# Altium PCB I2C_module_v1.PcbDoc (part 2 of 4)
Units mil, origin at the board's own origin, x right, y up, seen from the top; angles counter-clockwise.
Board outline 3300 x 2890 mil, 2 copper layers (Top Layer, Bottom Layer); 41 components, 28 nets, 177 pads, 28 vias.
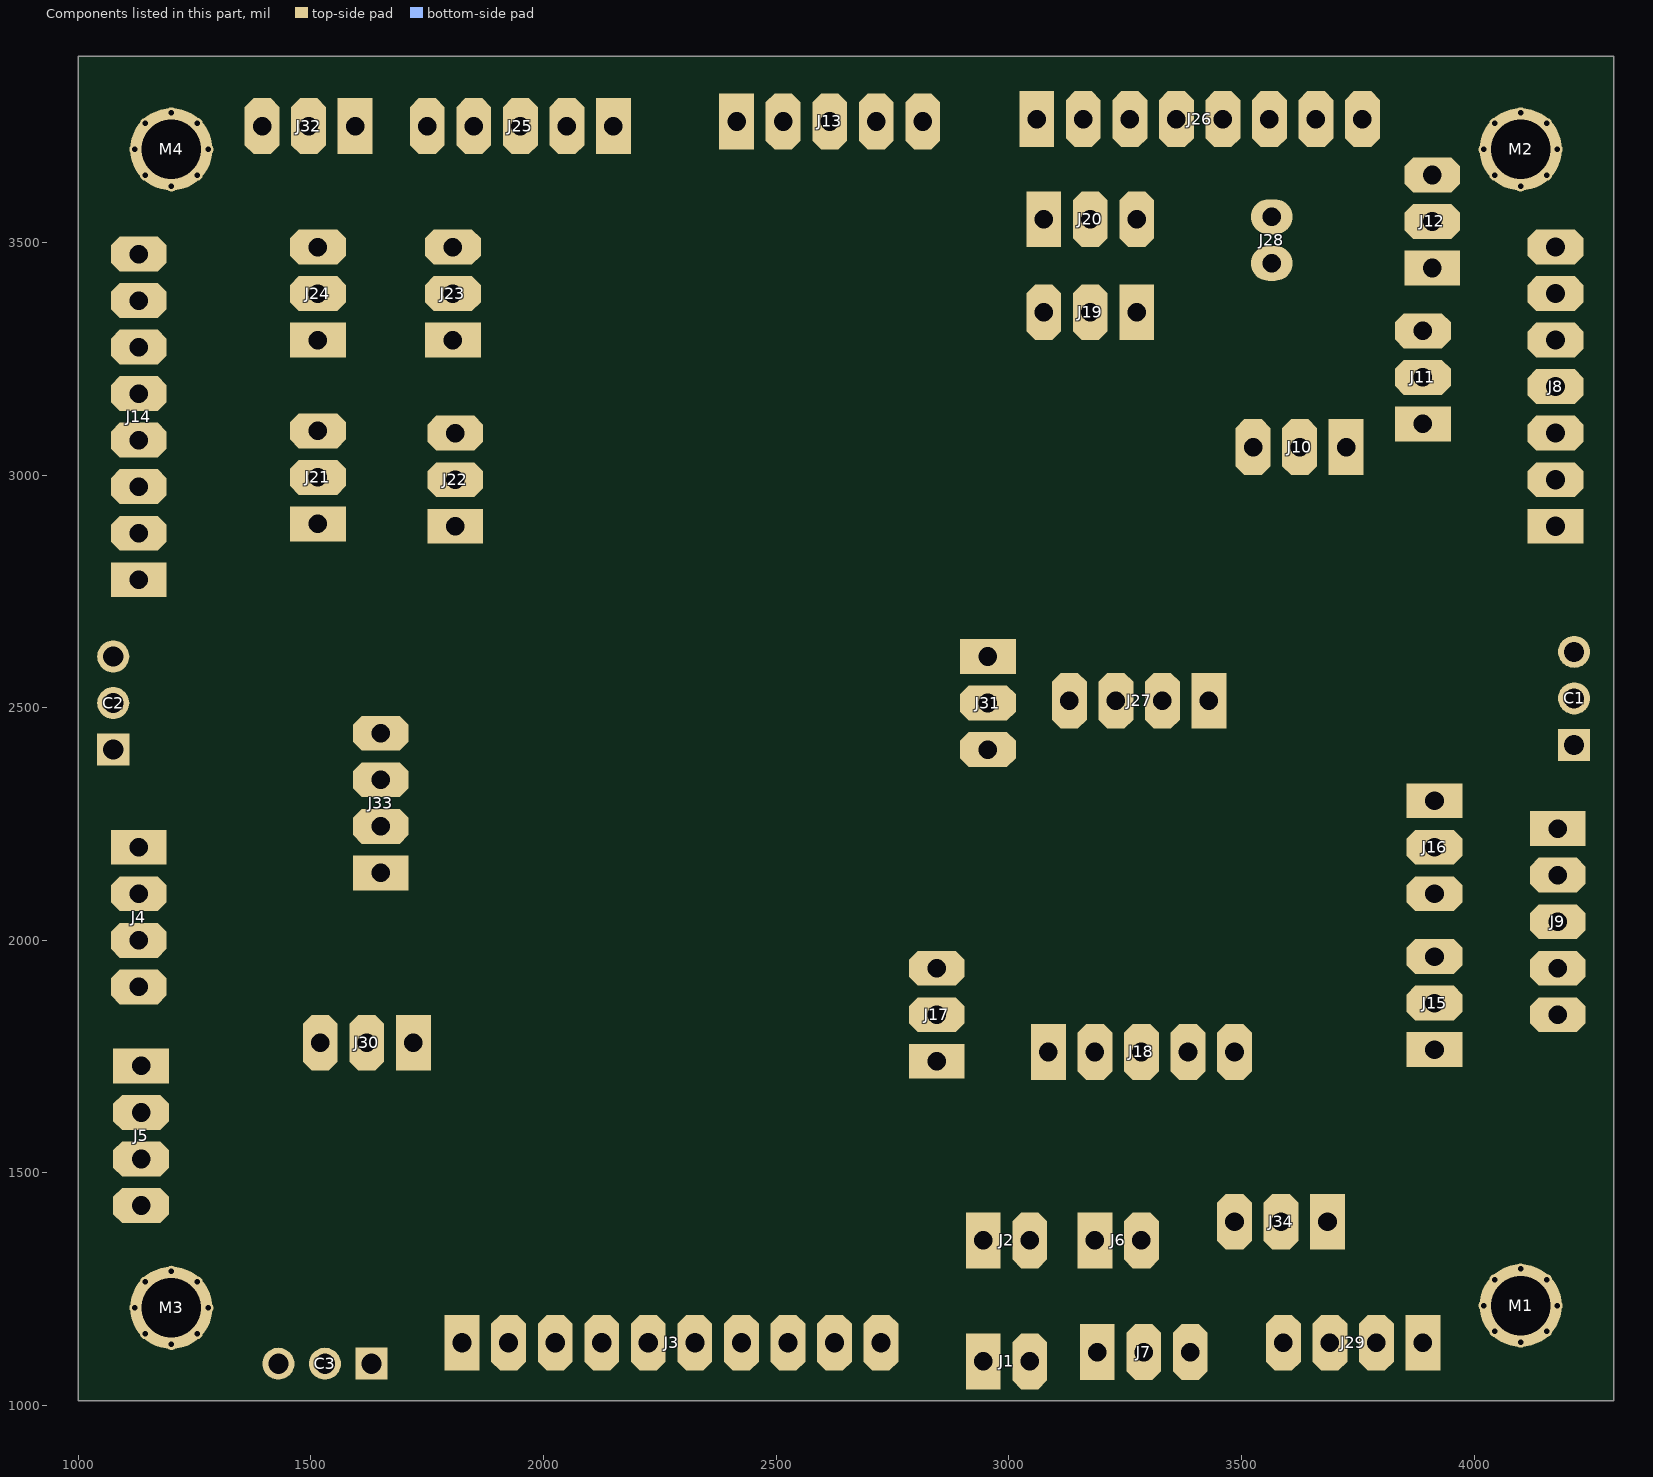
[diagram p2: the components of this part, seen from the top]

## Via types
v1: diameter 50, hole 28, Top Layer to Bottom Layer, 28 vias

## Nets (pads, with @x,y where several pads share a name; then routed paths per layer and width w, separated by ;. In a path a pad name is that pad's centre, name@x,y a point inside that pad or via, vN(x,y) a via of type N, cw(c..) or ccw(c..) an arc to the next point about the centre after c; other vN are vias at no path point) (continued)
copper on no net: (continued)
  Top Layer w0.3: 1831.2,2302.7 1835.7,2302.7 ; 1831.2,2303 1832.4,2303 ; 1831.5,2304.8 1832.1,2304.8 ; 1831.5,2305.1 1832.4,2305.1 ; 1831.5,2305.4 1832.4,2305.4 ; 1831.5,2305.7 1832.7,2305.7 ; 1831.5,2306 1832.7,2306 ; 1831.5,2306.3 1833,2306.3 ; 1831.5,2306.6 1833,2306.6 ; 1831.5,2306.9 1833.3,2306.9 ; 1831.5,2307.2 1833.6,2307.2 ; 1831.5,2307.5 1833.6,2307.5 ; 1831.8,2302.4 1838.7,2302.4 ; 1831.8,2307.8 1833.9,2307.8 ; 1831.8,2308.1 1833.9,2308.1 ; 1831.8,2308.4 1834.2,2308.4 ; 1831.8,2308.7 1834.5,2308.7 ; 1831.8,2309 1834.5,2309 ; 1831.8,2309.3 1834.8,2309.3 ; 1831.8,2309.6 1835.1,2309.6 ; 1831.8,2309.9 1835.1,2309.9 ; 1831.8,2310.2 1835.4,2310.2 ; 1831.8,2310.5 1835.7,2310.5 ; 1831.8,2310.8 1836,2310.8 ; 1832.1,2311.1 1836,2311.1 ; 1832.1,2311.4 1836.3,2311.4 ; 1832.1,2311.7 1836.6,2311.7 ; 1832.1,2312 1836.6,2312 ; 1832.1,2312.3 1836.9,2312.3 ; 1832.1,2312.6 1837.2,2312.6 ; 1832.1,2312.9 1837.5,2312.9 ; 1832.4,2302.1 1841.7,2302.1 ; 1832.4,2313.2 1837.8,2313.2 ; 1832.4,2313.5 1838.1,2313.5 ; 1832.4,2313.8 1838.1,2313.8 ; 1832.4,2314.1 1838.4,2314.1 ; 1832.4,2314.4 1838.7,2314.4 ; 1832.4,2314.7 1839,2314.7 ; 1832.7,2301.8 1845,2301.8 ; 1832.7,2315 1839.3,2315 ; 1832.7,2315.3 1839.6,2315.3 ; 1832.7,2315.6 1839.9,2315.6 ; 1832.7,2315.9 1840.5,2315.9 ; 1832.7,2316.2 1840.8,2316.2 ; 1832.7,2316.5 1841.1,2316.5 ; 1833,2316.8 1841.7,2316.8 ; 1833,2317.1 1842,2317.1 ; 1833,2317.4 1842.6,2317.4 ; 1833,2317.7 1843.2,2317.7 ; 1833,2318 1843.8,2318 ; 1833.3,2301.5 1848.3,2301.5 ; 1833.3,2318.3 1845,2318.3 ; 1833.3,2318.6 1872.3,2318.6 ; 1833.3,2318.9 1872.3,2318.9 ; 1833.3,2319.2 1872.3,2319.2 ; 1833.6,2319.5 1872,2319.5 ; 1833.6,2319.8 1872,2319.8 ; 1833.6,2320.1 1872,2320.1 ; 1833.6,2320.4 1871.7,2320.4 ; 1833.9,2301.2 1851.9,2301.2 ; 1833.9,2320.7 1871.7,2320.7 ; 1833.9,2321 1871.7,2321 ; 1833.9,2321.3 1871.4,2321.3 ; 1833.9,2321.6 1871.4,2321.6 ; 1834.2,2321.9 1871.1,2321.9 ; 1834.2,2322.2 1871.1,2322.2 ; 1834.2,2322.5 1871.1,2322.5 ; 1834.2,2322.8 1870.8,2322.8 ; 1834.5,2323.1 1870.8,2323.1 ; 1834.5,2323.4 1870.5,2323.4 ; 1834.5,2323.7 1870.5,2323.7 ; 1834.8,2300.9 1855.5,2300.9 ; 1834.8,2324 1870.5,2324 ; 1834.8,2324.3 1870.2,2324.3 ; 1834.8,2324.6 1870.2,2324.6 ; 1834.8,2324.9 1869.9,2324.9 ; 1835.1,2325.2 1869.9,2325.2 ; 1835.1,2325.5 1869.9,2325.5 ; 1835.1,2325.8 1869.6,2325.8 ; 1835.4,2300.6 1859.4,2300.6 ; 1835.4,2326.1 1869.6,2326.1 ; 1835.4,2326.4 1869.3,2326.4 ; 1835.4,2326.7 1869.3,2326.7 ; 1835.7,2327 1869.3,2327 ; 1835.7,2327.3 1869,2327.3 ; 1835.7,2327.6 1869,2327.6 ; 1836,2300.3 1877.4,2300.3 ; 1836,2327.9 1868.7,2327.9 ; 1836,2328.2 1868.7,2328.2 ; 1836,2328.5 1868.4,2328.5 ; 1836.3,2328.8 1868.4,2328.8 ; 1836.3,2329.1 1868.1,2329.1 ; 1836.6,2300 1877.4,2300 ; 1836.6,2329.4 1868.1,2329.4 ; 1836.6,2329.7 1867.8,2329.7 ; 1836.6,2330 1867.8,2330 ; 1836.9,2330.3 1867.5,2330.3 ; 1836.9,2330.6 1867.5,2330.6 ; 1837.2,2330.9 1867.2,2330.9 ; 1837.2,2331.2 1867.2,2331.2 ; 1837.2,2331.5 1866.9,2331.5 ; 1837.5,2299.7 1878.9,2299.7 ; 1837.5,2331.8 1866.9,2331.8 ; 1837.5,2332.1 1866.6,2332.1 ; 1837.8,2332.4 1866.6,2332.4 ; 1837.8,2332.7 1866.3,2332.7 ; 1838.1,2299.4 1971.6,2299.4 ; 1838.1,2333 1866,2333 ; 1838.1,2333.3 1866,2333.3 ; 1838.1,2333.6 1865.7,2333.6 ; 1838.4,2333.9 1865.7,2333.9 ; 1838.4,2334.2 1865.4,2334.2 ; 1838.7,2334.5 1865.4,2334.5 ; 1838.7,2334.8 1865.1,2334.8 ; 1839,2299.1 1970.1,2299.1 ; 1839,2335.1 1864.8,2335.1 ; 1839,2335.4 1864.8,2335.4 ; 1839.3,2335.7 1864.5,2335.7 ; 1839.6,2298.8 1968.6,2298.8 ; 1839.6,2336 1864.2,2336 ; 1839.6,2336.3 1864.2,2336.3 ; 1839.9,2336.6 1863.9,2336.6 ; 1839.9,2336.9 1863.6,2336.9 ; 1840.2,2337.2 1863.3,2337.2 ; 1840.2,2337.5 1863.3,2337.5 ; 1840.5,2298.5 1967.4,2298.5 ; 1840.5,2337.8 1863,2337.8 ; 1840.8,2338.1 1862.7,2338.1 ; 1840.8,2338.4 1862.4,2338.4 ; 1841.1,2338.7 1862.4,2338.7 ; 1841.4,2298.2 1965.9,2298.2 ; 1841.4,2339 1862.1,2339 ; 1841.4,2339.3 1861.8,2339.3 ; 1841.7,2339.6 1861.5,2339.6 ; 1842,2297.9 1964.4,2297.9 ; 1842,2339.9 1861.2,2339.9 ; 1842.3,2340.2 1860.9,2340.2 ; 1842.3,2340.5 1860.6,2340.5 ; 1842.6,2340.8 1860.3,2340.8 ; 1842.9,2297.6 1962.9,2297.6 ; 1842.9,2341.1 1860,2341.1 ; 1843.2,2341.4 1859.7,2341.4 ; 1843.5,2341.7 1859.4,2341.7 ; 1843.8,2297.3 1961.4,2297.3 ; 1843.8,2342 1859.1,2342 ; 1844.1,2342.3 1858.8,2342.3 ; 1844.4,2342.6 1858.2,2342.6 ; 1844.7,2297 1959.6,2297 ; 1844.7,2342.9 1857.9,2342.9 ; 1845,2343.2 1857.6,2343.2 ; 1845.6,2343.5 1857,2343.5 ; 1845.9,2296.7 1958.1,2296.7 ; 1845.9,2343.8 1856.7,2343.8 ; 1846.5,2344.1 1856.1,2344.1 ; 1847.1,2296.4 1956,2296.4 ; 1847.1,2318.3 1872.6,2318.3 ; 1847.1,2344.4 1855.5,2344.4 ; 1847.7,2344.7 1854.6,2344.7 ; 1848.3,2296.1 1953.9,2296.1 ; 1848.3,2318 1872.6,2318 ; 1848.3,2345 1854,2345 ; 1848.9,2317.7 1872.6,2317.7 ; 1849.5,2317.4 1872.9,2317.4 ; 1849.5,2345.3 1852.5,2345.3 ; 1849.8,2295.8 1951.8,2295.8 ; 1850.1,2317.1 1872.9,2317.1 ; 1850.7,2316.8 1872.9,2316.8 ; 1851,2316.5 1873.2,2316.5 ; 1851.3,2295.5 1949.4,2295.5 ; 1851.3,2316.2 1873.2,2316.2 ; 1851.6,2315.9 1873.2,2315.9 ; 1852.2,2315.6 1873.5,2315.6 ; 1852.5,2315.3 1873.5,2315.3 ; 1852.8,2315 1873.5,2315 ; 1853.1,2295.2 1946.7,2295.2 ; 1853.1,2314.4 1873.8,2314.4 ; 1853.1,2314.7 1873.8,2314.7 ; 1853.4,2314.1 1873.8,2314.1 ; 1853.7,2313.8 1873.8,2313.8 ; 1854,2313.5 1874.1,2313.5 ; 1854.3,2313.2 1874.1,2313.2 ; 1854.6,2312.9 1874.1,2312.9 ; 1854.9,2294.9 1944,2294.9 ; 1854.9,2312.3 1874.4,2312.3 ; 1854.9,2312.6 1874.4,2312.6 ; 1855.2,2312 1874.4,2312 ; 1855.5,2311.7 1874.7,2311.7 ; 1855.8,2311.1 1874.7,2311.1 ; 1855.8,2311.4 1874.7,2311.4 ; 1856.1,2310.8 1874.7,2310.8 ; 1856.4,2310.2 1875,2310.2 ; 1856.4,2310.5 1875,2310.5 ; 1856.7,2309.9 1875,2309.9 ; 1857,2309.6 1875,2309.6 ; 1857.3,2294.6 1941.3,2294.6 ; 1857.3,2309 1875.3,2309 ; 1857.3,2309.3 1875.3,2309.3 ; 1857.6,2308.4 1875.6,2308.4 ; 1857.6,2308.7 1875.3,2308.7 ; 1857.9,2308.1 1875.6,2308.1 ; 1858.2,2307.5 1875.6,2307.5 ; 1858.2,2307.8 1875.6,2307.8 ; 1858.5,2307.2 1875.9,2307.2 ; 1858.8,2306.6 1875.9,2306.6 ; 1858.8,2306.9 1875.9,2306.9 ; 1859.1,2306 1876.2,2306 ; 1859.1,2306.3 1875.9,2306.3 ; 1859.4,2305.7 1876.2,2305.7 ; 1859.7,2294.3 1938,2294.3 ; 1859.7,2305.1 1876.2,2305.1 ; 1859.7,2305.4 1876.2,2305.4 ; 1860,2304.5 1876.5,2304.5 ; 1860,2304.8 1876.5,2304.8 ; 1860.3,2303.9 1876.5,2303.9 ; 1860.3,2304.2 1876.5,2304.2 ; 1860.6,2303.6 1876.8,2303.6 ; 1860.9,2303 1876.8,2303 ; 1860.9,2303.3 1876.8,2303.3 ; 1861.2,2302.4 1877.1,2302.4 ; 1861.2,2302.7 1876.8,2302.7 ; 1861.5,2301.8 1877.1,2301.8 ; 1861.5,2302.1 1877.1,2302.1 ; 1861.8,2301.2 1877.4,2301.2 ; 1861.8,2301.5 1877.1,2301.5 ; 1862.1,2300.6 1877.4,2300.6 ; 1862.1,2300.9 1877.4,2300.9 ; 1862.4,2294 1934.7,2294 ; 1865.4,2293.4 1926.9,2293.4 ; 1865.4,2293.7 1931.1,2293.7 ; 1865.7,2292.5 1879.2,2292.5 ; 1865.7,2292.8 1878.9,2292.8 ; 1865.7,2293.1 1922.4,2293.1 ; 1866,2291.6 1879.2,2291.6 ; 1866,2291.9 1879.2,2291.9 ; 1866,2292.2 1879.2,2292.2 ; 1866.3,2291 1879.5,2291 ; 1866.3,2291.3 1879.2,2291.3 ; 1866.6,2290.1 1879.5,2290.1 ; 1866.6,2290.4 1879.5,2290.4 ; 1866.6,2290.7 1879.5,2290.7 ; 1866.9,2289.2 1879.8,2289.2 ; 1866.9,2289.5 1879.8,2289.5 ; 1866.9,2289.8 1879.5,2289.8 ; 1867.2,2288.3 1879.8,2288.3 ; 1867.2,2288.6 1879.8,2288.6 ; 1867.2,2288.9 1879.8,2288.9 ; 1867.5,2287.4 1880.1,2287.4 ; 1867.5,2287.7 1880.1,2287.7 ; 1867.5,2288 1879.8,2288 ; 1867.8,2286.5 1880.1,2286.5 ; 1867.8,2286.8 1880.1,2286.8 ; 1867.8,2287.1 1880.1,2287.1 ; 1868.1,2285.6 1880.4,2285.6 ; 1868.1,2285.9 1880.4,2285.9 ; 1868.1,2286.2 1880.1,2286.2 ; 1868.4,2284.7 1880.4,2284.7 ; 1868.4,2285 1880.4,2285 ; 1868.4,2285.3 1880.4,2285.3 ; 1868.7,2283.8 1880.7,2283.8 ; 1868.7,2284.1 1880.7,2284.1 ; 1868.7,2284.4 1880.4,2284.4 ; 1869,2282.9 1880.7,2282.9 ; 1869,2283.2 1880.7,2283.2 ; 1869,2283.5 1880.7,2283.5 ; 1869.3,2281.7 1881,2281.7 ; 1869.3,2282 1881,2282 ; 1869.3,2282.3 1881,2282.3 ; 1869.3,2282.6 1880.7,2282.6 ; 1869.6,2280.8 1881,2280.8 ; 1869.6,2281.1 1881,2281.1 ; 1869.6,2281.4 1881,2281.4 ; 1869.9,2279.6 1881.3,2279.6 ; 1869.9,2279.9 1881.3,2279.9 ; 1869.9,2280.2 1881.3,2280.2 ; 1869.9,2280.5 1881.3,2280.5 ; 1870.2,2278.7 1881.6,2278.7 ; 1870.2,2279 1881.3,2279 ; 1870.2,2279.3 1881.3,2279.3 ; 1870.5,2277.5 1881.6,2277.5 ; 1870.5,2277.8 1881.6,2277.8 ; 1870.5,2278.1 1881.6,2278.1 ; 1870.5,2278.4 1881.6,2278.4 ; 1870.8,2276.3 1881.9,2276.3 ; 1870.8,2276.6 1881.9,2276.6 ; 1870.8,2276.9 1881.6,2276.9 ; 1870.8,2277.2 1881.6,2277.2 ; 1871.1,2275.1 1881.9,2275.1 ; 1871.1,2275.4 1881.9,2275.4 ; 1871.1,2275.7 1881.9,2275.7 ; 1871.1,2276 1881.9,2276 ; 1871.4,2273.9 1882.2,2273.9 ; 1871.4,2274.2 1882.2,2274.2 ; 1871.4,2274.5 1882.2,2274.5 ; 1871.4,2274.8 1881.9,2274.8 ; 1871.7,2272.7 1882.2,2272.7 ; 1871.7,2273 1882.2,2273 ; 1871.7,2273.3 1882.2,2273.3 ; 1871.7,2273.6 1882.2,2273.6 ; 1872,2271.5 1882.5,2271.5 ; 1872,2271.8 1882.5,2271.8 ; 1872,2272.1 1882.5,2272.1 ; 1872,2272.4 1882.5,2272.4 ; 1872.3,2270.3 1882.5,2270.3 ; 1872.3,2270.6 1882.5,2270.6 ; 1872.3,2270.9 1882.5,2270.9 ; 1872.3,2271.2 1882.5,2271.2 ; 1872.6,2268.8 1882.8,2268.8 ; 1872.6,2269.1 1882.8,2269.1 ; 1872.6,2269.4 1882.8,2269.4 ; 1872.6,2269.7 1882.8,2269.7 ; 1872.6,2270 1882.8,2270 ; 1872.9,2267.6 1883.1,2267.6 ; 1872.9,2267.9 1882.8,2267.9 ; 1872.9,2268.2 1882.8,2268.2 ; 1872.9,2268.5 1882.8,2268.5 ; 1873.2,2266.1 1883.1,2266.1 ; 1873.2,2266.4 1883.1,2266.4 ; 1873.2,2266.7 1883.1,2266.7 ; 1873.2,2267 1883.1,2267 ; 1873.2,2267.3 1883.1,2267.3 ; 1873.5,2264.9 1883.4,2264.9 ; 1873.5,2265.2 1883.4,2265.2 ; 1873.5,2265.5 1883.1,2265.5 ; 1873.5,2265.8 1883.1,2265.8 ; 1873.8,2263.4 1883.4,2263.4 ; 1873.8,2263.7 1883.4,2263.7 ; 1873.8,2264 1883.4,2264 ; 1873.8,2264.3 1883.4,2264.3 ; 1873.8,2264.6 1883.4,2264.6 ; 1874.1,2261.9 1883.7,2261.9 ; 1874.1,2262.2 1883.7,2262.2 ; 1874.1,2262.5 1883.7,2262.5 ; 1874.1,2262.8 1883.7,2262.8 ; 1874.1,2263.1 1883.4,2263.1 ; 1874.4,2260.1 1883.7,2260.1 ; 1874.4,2260.4 1883.7,2260.4 ; 1874.4,2260.7 1883.7,2260.7 ; 1874.4,2261 1883.7,2261 ; 1874.4,2261.3 1883.7,2261.3 ; 1874.4,2261.6 1883.7,2261.6 ; 1874.7,2258.6 1884,2258.6 ; 1874.7,2258.9 1884,2258.9 ; 1874.7,2259.2 1884,2259.2 ; 1874.7,2259.5 1884,2259.5 ; 1874.7,2259.8 1884,2259.8 ; 1875,2257.1 1884.3,2257.1 ; 1875,2257.4 1884,2257.4 ; 1875,2257.7 1884,2257.7 ; 1875,2258 1884,2258 ; 1875,2258.3 1884,2258.3 ; 1875.3,2255.3 1884.3,2255.3 ; 1875.3,2255.6 1884.3,2255.6 ; 1875.3,2255.9 1884.3,2255.9 ; 1875.3,2256.2 1884.3,2256.2 ; 1875.3,2256.5 1884.3,2256.5 ; 1875.3,2256.8 1884.3,2256.8 ; 1875.6,2253.5 1884.6,2253.5 ; 1875.6,2253.8 1884.6,2253.8 ; 1875.6,2254.1 1884.6,2254.1 ; 1875.6,2254.4 1884.3,2254.4 ; 1875.6,2254.7 1884.3,2254.7 ; 1875.6,2255 1884.3,2255 ; 1875.9,2251.7 1884.6,2251.7 ; 1875.9,2252 1884.6,2252 ; 1875.9,2252.3 1884.6,2252.3 ; 1875.9,2252.6 1884.6,2252.6 ; 1875.9,2252.9 1884.6,2252.9 ; 1875.9,2253.2 1884.6,2253.2 ; 1876.2,2148.5 1876.5,2148.5 ; 1876.2,2148.8 1876.5,2148.8 ; 1876.2,2149.1 1876.8,2149.1 ; 1876.2,2149.4 1876.8,2149.4 ; 1876.2,2149.7 1877.1,2149.7 ; 1876.2,2150 1877.1,2150 ; 1876.2,2150.3 1877.4,2150.3 ; 1876.2,2150.6 1877.4,2150.6 ; 1876.2,2150.9 1877.7,2150.9 ; 1876.2,2151.2 1877.7,2151.2 ; 1876.2,2151.5 1878,2151.5 ; 1876.2,2151.8 1878,2151.8 ; 1876.2,2152.1 1878,2152.1 ; 1876.2,2152.4 1878.3,2152.4 ; 1876.2,2152.7 1878.3,2152.7 ; 1876.2,2153 1878.6,2153 ; 1876.2,2249.9 1884.9,2249.9 ; 1876.2,2250.2 1884.9,2250.2 ; 1876.2,2250.5 1884.9,2250.5 ; 1876.2,2250.8 1884.9,2250.8 ; 1876.2,2251.1 1884.6,2251.1 ; 1876.2,2251.4 1884.6,2251.4 ; 1876.5,2153.3 1878.6,2153.3 ; 1876.5,2153.6 1878.6,2153.6 ; 1876.5,2153.9 1878.9,2153.9 ; 1876.5,2154.2 1878.9,2154.2 ; 1876.5,2154.5 1878.9,2154.5 ; 1876.5,2154.8 1879.2,2154.8 ; 1876.5,2155.1 1879.2,2155.1 ; 1876.5,2247.8 1884.9,2247.8 ; 1876.5,2248.1 1884.9,2248.1 ; 1876.5,2248.4 1884.9,2248.4 ; 1876.5,2248.7 1884.9,2248.7 ; 1876.5,2249 1884.9,2249 ; 1876.5,2249.3 1884.9,2249.3 ; 1876.5,2249.6 1884.9,2249.6 ; 1876.8,2155.4 1879.2,2155.4 ; 1876.8,2155.7 1879.5,2155.7 ; 1876.8,2156 1879.5,2156 ; 1876.8,2156.3 1879.5,2156.3 ; 1876.8,2156.6 1879.8,2156.6 ; 1876.8,2156.9 1879.8,2156.9 ; 1876.8,2245.7 1885.2,2245.7 ; 1876.8,2246 1885.2,2246 ; 1876.8,2246.3 1885.2,2246.3 ; 1876.8,2246.6 1885.2,2246.6 ; 1876.8,2246.9 1885.2,2246.9 ; 1876.8,2247.2 1885.2,2247.2 ; 1876.8,2247.5 1884.9,2247.5 ; 1877.1,2157.2 1879.8,2157.2 ; 1877.1,2157.5 1880.1,2157.5 ; 1877.1,2157.8 1880.1,2157.8 ; 1877.1,2158.1 1880.1,2158.1 ; 1877.1,2158.4 1880.1,2158.4 ; 1877.1,2158.7 1880.4,2158.7 ; 1877.1,2243.6 1885.2,2243.6 ; 1877.1,2243.9 1885.2,2243.9 ; 1877.1,2244.2 1885.2,2244.2 ; 1877.1,2244.5 1885.2,2244.5 ; 1877.1,2244.8 1885.2,2244.8 ; 1877.1,2245.1 1885.2,2245.1 ; 1877.1,2245.4 1885.2,2245.4 ; 1877.4,2159 1880.4,2159 ; 1877.4,2159.3 1880.4,2159.3 ; 1877.4,2159.6 1880.4,2159.6 ; 1877.4,2159.9 1880.7,2159.9 ; 1877.4,2160.2 1880.7,2160.2 ; 1877.4,2160.5 1880.7,2160.5 ; 1877.4,2241.5 1885.5,2241.5 ; 1877.4,2241.8 1885.5,2241.8 ; 1877.4,2242.1 1885.5,2242.1 ; 1877.4,2242.4 1885.5,2242.4 ; 1877.4,2242.7 1885.5,2242.7 ; 1877.4,2243 1885.5,2243 ; 1877.4,2243.3 1885.5,2243.3 ; 1877.7,2160.8 1880.7,2160.8 ; 1877.7,2161.1 1881,2161.1 ; 1877.7,2161.4 1881,2161.4 ; 1877.7,2161.7 1881,2161.7 ; 1877.7,2162 1881,2162 ; 1877.7,2162.3 1881.3,2162.3 ; 1877.7,2239.1 1885.5,2239.1 ; 1877.7,2239.4 1885.5,2239.4 ; 1877.7,2239.7 1885.5,2239.7 ; 1877.7,2240 1885.5,2240 ; 1877.7,2240.3 1885.5,2240.3 ; 1877.7,2240.6 1885.5,2240.6 ; 1877.7,2240.9 1885.5,2240.9 ; 1877.7,2241.2 1885.5,2241.2 ; 1878,2162.6 1881.3,2162.6 ; 1878,2162.9 1881.3,2162.9 ; 1878,2163.2 1881.3,2163.2 ; 1878,2163.5 1881.6,2163.5 ; 1878,2163.8 1881.6,2163.8 ; 1878,2164.1 1881.6,2164.1 ; 1878,2236.7 1885.8,2236.7 ; 1878,2237 1885.8,2237 ; 1878,2237.3 1885.8,2237.3 ; 1878,2237.6 1885.8,2237.6 ; 1878,2237.9 1885.8,2237.9 ; 1878,2238.2 1885.8,2238.2 ; 1878,2238.5 1885.8,2238.5 ; 1878,2238.8 1885.8,2238.8 ; 1878.3,2164.4 1881.6,2164.4 ; 1878.3,2164.7 1881.6,2164.7 ; 1878.3,2165 1881.9,2165 ; 1878.3,2165.3 1881.9,2165.3 ; 1878.3,2165.6 1881.9,2165.6 ; 1878.3,2165.9 1881.9,2165.9 ; 1878.3,2234 1885.8,2234 ; 1878.3,2234.3 1885.8,2234.3 ; 1878.3,2234.6 1885.8,2234.6 ; 1878.3,2234.9 1885.8,2234.9 ; 1878.3,2235.2 1885.8,2235.2 ; 1878.3,2235.5 1885.8,2235.5 ; 1878.3,2235.8 1885.8,2235.8 ; 1878.3,2236.1 1885.8,2236.1 ; 1878.3,2236.4 1885.8,2236.4 ; 1878.6,2166.2 1881.9,2166.2 ; 1878.6,2166.5 1882.2,2166.5 ; 1878.6,2166.8 1882.2,2166.8 ; 1878.6,2167.1 1882.2,2167.1 ; 1878.6,2167.4 1882.2,2167.4 ; 1878.6,2167.7 1882.2,2167.7 ; 1878.6,2231.3 1886.1,2231.3 ; 1878.6,2231.6 1886.1,2231.6 ; 1878.6,2231.9 1886.1,2231.9 ; 1878.6,2232.2 1886.1,2232.2 ; 1878.6,2232.5 1886.1,2232.5 ; 1878.6,2232.8 1886.1,2232.8 ; 1878.6,2233.1 1886.1,2233.1 ; 1878.6,2233.4 1886.1,2233.4 ; 1878.6,2233.7 1886.1,2233.7 ; 1878.9,2168 1882.5,2168 ; 1878.9,2168.3 1882.5,2168.3 ; 1878.9,2168.6 1882.5,2168.6 ; 1878.9,2168.9 1882.5,2168.9 ; 1878.9,2169.2 1882.5,2169.2 ; 1878.9,2169.5 1882.5,2169.5 ; 1878.9,2169.8 1882.8,2169.8 ; 1878.9,2228.3 1886.1,2228.3 ; 1878.9,2228.6 1886.1,2228.6 ; 1878.9,2228.9 1886.1,2228.9 ; 1878.9,2229.2 1886.1,2229.2 ; 1878.9,2229.5 1886.1,2229.5 ; 1878.9,2229.8 1886.1,2229.8 ; 1878.9,2230.1 1886.1,2230.1 ; 1878.9,2230.4 1886.1,2230.4 ; 1878.9,2230.7 1886.1,2230.7 ; 1878.9,2231 1886.1,2231 ; 1879.2,2170.1 1882.8,2170.1 ; 1879.2,2170.4 1882.8,2170.4 ; 1879.2,2170.7 1882.8,2170.7 ; 1879.2,2171 1882.8,2171 ; 1879.2,2171.3 1882.8,2171.3 ; 1879.2,2171.6 1883.1,2171.6 ; 1879.2,2171.9 1883.1,2171.9 ; 1879.2,2172.2 1883.1,2172.2 ; 1879.2,2225 1886.4,2225 ; 1879.2,2225.3 1886.4,2225.3 ; 1879.2,2225.6 1886.4,2225.6 ; 1879.2,2225.9 1886.4,2225.9 ; 1879.2,2226.2 1886.4,2226.2 ; 1879.2,2226.5 1886.4,2226.5 ; 1879.2,2226.8 1886.4,2226.8 ; 1879.2,2227.1 1886.1,2227.1 ; 1879.2,2227.4 1886.1,2227.4 ; 1879.2,2227.7 1886.1,2227.7 ; 1879.2,2228 1886.1,2228 ; 1879.5,2172.5 1883.1,2172.5 ; 1879.5,2172.8 1883.1,2172.8 ; 1879.5,2173.1 1883.1,2173.1 ; 1879.5,2173.4 1883.4,2173.4 ; 1879.5,2173.7 1883.4,2173.7 ; 1879.5,2174 1883.4,2174 ; 1879.5,2174.3 1883.4,2174.3 ; 1879.5,2174.6 1883.4,2174.6 ; 1879.5,2174.9 1883.4,2174.9 ; 1879.5,2175.2 1883.4,2175.2 ; 1879.5,2175.5 1883.7,2175.5 ; 1879.5,2221.4 1886.4,2221.4 ; 1879.5,2221.7 1886.4,2221.7 ; 1879.5,2222 1886.4,2222 ; 1879.5,2222.3 1886.4,2222.3 ; 1879.5,2222.6 1886.4,2222.6 ; 1879.5,2222.9 1886.4,2222.9 ; 1879.5,2223.2 1886.4,2223.2 ; 1879.5,2223.5 1886.4,2223.5 ; 1879.5,2223.8 1886.4,2223.8 ; 1879.5,2224.1 1886.4,2224.1 ; 1879.5,2224.4 1886.4,2224.4 ; 1879.5,2224.7 1886.4,2224.7 ; 1879.8,2175.8 1883.7,2175.8 ; 1879.8,2176.1 1883.7,2176.1 ; 1879.8,2176.4 1883.7,2176.4 ; 1879.8,2176.7 1883.7,2176.7 ; 1879.8,2177 1883.7,2177 ; 1879.8,2177.3 1883.7,2177.3 ; 1879.8,2177.6 1884,2177.6 ; 1879.8,2177.9 1884,2177.9 ; 1879.8,2178.2 1884,2178.2 ; 1879.8,2178.5 1884,2178.5 ; 1879.8,2178.8 1884,2178.8 ; 1879.8,2179.1 1884,2179.1 ; 1879.8,2179.4 1884,2179.4 ; 1879.8,2179.7 1884,2179.7 ; 1879.8,2180 1884.3,2180 ; 1879.8,2180.3 1884.3,2180.3 ; 1879.8,2217.2 1886.4,2217.2 ; 1879.8,2217.5 1886.4,2217.5 ; 1879.8,2217.8 1886.4,2217.8 ; 1879.8,2218.1 1886.4,2218.1 ; 1879.8,2218.4 1886.4,2218.4 ; 1879.8,2218.7 1886.4,2218.7 ; 1879.8,2219 1886.4,2219 ; 1879.8,2219.3 1886.4,2219.3 ; 1879.8,2219.6 1886.4,2219.6 ; 1879.8,2219.9 1886.4,2219.9 ; 1879.8,2220.2 1886.4,2220.2 ; 1879.8,2220.5 1886.4,2220.5 ; 1879.8,2220.8 1886.4,2220.8 ; 1879.8,2221.1 1886.4,2221.1 ; 1880.1,2180.6 1884.3,2180.6 ; 1880.1,2180.9 1884.3,2180.9 ; 1880.1,2181.2 1884.3,2181.2 ; 1880.1,2181.5 1884.3,2181.5 ; 1880.1,2181.8 1884.3,2181.8 ; 1880.1,2182.1 1884.3,2182.1 ; 1880.1,2182.4 1884.6,2182.4 ; 1880.1,2182.7 1884.6,2182.7 ; 1880.1,2183 1884.6,2183 ; 1880.1,2183.3 1884.6,2183.3 ; 1880.1,2183.6 1884.6,2183.6 ; 1880.1,2183.9 1884.6,2183.9 ; 1880.1,2184.2 1884.6,2184.2 ; 1880.1,2184.5 1884.6,2184.5 ; 1880.1,2184.8 1884.6,2184.8 ; 1880.1,2185.1 1884.9,2185.1 ; 1880.1,2185.4 1884.9,2185.4 ; 1880.1,2185.7 1884.9,2185.7 ; 1880.1,2186 1884.9,2186 ; 1880.1,2186.3 1884.9,2186.3 ; 1880.1,2211.8 1886.4,2211.8 ; 1880.1,2212.1 1886.4,2212.1 ; 1880.1,2212.4 1886.4,2212.4 ; 1880.1,2212.7 1886.4,2212.7 ; 1880.1,2213 1886.4,2213 ; 1880.1,2213.3 1886.4,2213.3 ; 1880.1,2213.6 1886.4,2213.6 ; 1880.1,2213.9 1886.4,2213.9 ; 1880.1,2214.2 1886.4,2214.2 ; 1880.1,2214.5 1886.4,2214.5 ; 1880.1,2214.8 1886.4,2214.8 ; 1880.1,2215.1 1886.4,2215.1 ; 1880.1,2215.4 1886.4,2215.4 ; 1880.1,2215.7 1886.4,2215.7 ; 1880.1,2216 1886.4,2216 ; 1880.1,2216.3 1886.4,2216.3 ; 1880.1,2216.6 1886.4,2216.6 ; 1880.1,2216.9 1886.4,2216.9 ; 1880.4,2186.6 1884.9,2186.6 ; 1880.4,2186.9 1884.9,2186.9 ; 1880.4,2187.2 1884.9,2187.2 ; 1880.4,2187.5 1884.9,2187.5 ; 1880.4,2187.8 1884.9,2187.8 ; 1880.4,2188.1 1885.2,2188.1 ; 1880.4,2188.4 1885.2,2188.4 ; 1880.4,2188.7 1885.2,2188.7 ; 1880.4,2189 1885.2,2189 ; 1880.4,2189.3 1885.2,2189.3 ; 1880.4,2189.6 1885.2,2189.6 ; 1880.4,2189.9 1885.2,2189.9 ; 1880.4,2190.2 1885.2,2190.2 ; 1880.4,2190.5 1885.2,2190.5 ; 1880.4,2190.8 1885.2,2190.8 ; 1880.4,2191.1 1885.2,2191.1 ; 1880.4,2191.4 1885.2,2191.4 ; 1880.4,2191.7 1885.5,2191.7 ; 1880.4,2192 1885.5,2192 ; 1880.4,2192.3 1885.5,2192.3 ; 1880.4,2192.6 1885.5,2192.6 ; 1880.4,2192.9 1885.5,2192.9 ; 1880.4,2193.2 1885.5,2193.2 ; 1880.4,2193.5 1885.5,2193.5 ; 1880.4,2193.8 1885.5,2193.8 ; 1880.4,2194.1 1885.5,2194.1 ; 1880.4,2194.4 1885.5,2194.4 ; 1880.4,2194.7 1885.5,2194.7 ; 1880.4,2195 1885.5,2195 ; 1880.4,2195.3 1885.8,2195.3 ; 1880.4,2195.6 1885.8,2195.6 ; 1880.4,2195.9 1885.8,2195.9 ; 1880.4,2196.2 1885.8,2196.2 ; 1880.4,2196.5 1885.8,2196.5 ; 1880.4,2196.8 1885.8,2196.8 ; 1880.4,2197.1 1885.8,2197.1 ; 1880.4,2197.4 1885.8,2197.4 ; 1880.4,2197.7 1885.8,2197.7 ; 1880.4,2198 1885.8,2198 ; 1880.4,2198.3 1885.8,2198.3 ; 1880.4,2198.6 1885.8,2198.6 ; 1880.4,2198.9 1885.8,2198.9 ; 1880.4,2199.2 1885.8,2199.2 ; 1880.4,2199.5 1885.8,2199.5 ; 1880.4,2199.8 1886.1,2199.8 ; 1880.4,2200.1 1886.1,2200.1 ; 1880.4,2200.4 1886.1,2200.4 ; 1880.4,2200.7 1886.1,2200.7 ; 1880.4,2201 1886.1,2201 ; 1880.4,2201.3 1886.1,2201.3 ; 1880.4,2201.6 1886.1,2201.6 ; 1880.4,2201.9 1886.1,2201.9 ; 1880.4,2202.2 1886.1,2202.2 ; 1880.4,2202.5 1886.1,2202.5 ; 1880.4,2202.8 1886.1,2202.8 ; 1880.4,2203.1 1886.1,2203.1 ; 1880.4,2203.4 1886.1,2203.4 ; 1880.4,2203.7 1886.1,2203.7 ; 1880.4,2204 1886.1,2204 ; 1880.4,2204.3 1886.1,2204.3 ; 1880.4,2204.6 1886.1,2204.6 ; 1880.4,2204.9 1886.1,2204.9 ; 1880.4,2205.2 1886.1,2205.2 ; 1880.4,2205.5 1886.1,2205.5 ; 1880.4,2205.8 1886.4,2205.8 ; 1880.4,2206.1 1886.4,2206.1 ; 1880.4,2206.4 1886.4,2206.4 ; 1880.4,2206.7 1886.4,2206.7 ; 1880.4,2207 1886.4,2207 ; 1880.4,2207.3 1886.4,2207.3 ; 1880.4,2207.6 1886.4,2207.6 ; 1880.4,2207.9 1886.4,2207.9 ; 1880.4,2208.2 1886.4,2208.2 ; 1880.4,2208.5 1886.4,2208.5 ; 1880.4,2208.8 1886.4,2208.8 ; 1880.4,2209.1 1886.4,2209.1 ; 1880.4,2209.4 1886.4,2209.4 ; 1880.4,2209.7 1886.4,2209.7 ; 1880.4,2210 1886.4,2210 ; 1880.4,2210.3 1886.4,2210.3 ; 1880.4,2210.6 1886.4,2210.6 ; 1880.4,2210.9 1886.4,2210.9 ; 1880.4,2211.2 1886.4,2211.2 ; 1880.4,2211.5 1886.4,2211.5 ; 1881,2292.8 1917,2292.8 ; 1884,2283.5 1885.8,2283.5 ; 1884.3,2283.2 1889.1,2283.2 ; 1884.9,2282.9 1892.4,2282.9 ; 1885.5,2282.6 1895.7,2282.6 ; 1886.1,2282.3 1899.6,2282.3 ; 1886.7,2282 1903.5,2282 ; 1887.6,2281.7 1908.6,2281.7 ; 1887.9,2299.7 1972.8,2299.7 ; 1888.5,2281.4 1916.1,2281.4 ; 1889.4,2281.1 2029.2,2281.1 ; 1890.3,2280.8 2027.7,2280.8 ; 1891.5,2280.5 2025.9,2280.5 ; 1892.1,2292.5 1909.5,2292.5 ; 1892.4,2280.2 2024.4,2280.2 ; 1893.6,2279.9 2022.6,2279.9 ; 1894.5,2279.6 2020.8,2279.6 ; 1895.7,2279.3 2019.3,2279.3 ; 1896.3,2300 1974.3,2300 ; 1896.9,2141 1907.1,2141 ; 1896.9,2141.3 1907.1,2141.3 ; 1897.2,2152.4 1905.9,2152.4 ; 1897.2,2152.7 1905.9,2152.7 ; 1897.2,2153 1905.9,2153 ; 1897.2,2153.3 1905.9,2153.3 ; 1897.2,2153.6 1905.9,2153.6 ; 1897.2,2162.9 1905.9,2162.9 ; 1897.2,2163.2 1905.9,2163.2 ; 1897.2,2163.5 1905.9,2163.5 ; 1897.2,2163.8 1905.9,2163.8 ; 1897.2,2279 2017.5,2279 ; 1897.5,2151.5 1905.6,2151.5 ; 1897.5,2151.8 1905.6,2151.8 ; 1897.5,2152.1 1905.9,2152.1 ; 1897.5,2153.9 1905.9,2153.9 ; 1897.5,2154.2 1905.6,2154.2 ; 1897.5,2154.5 1905.6,2154.5 ; 1897.5,2154.8 1905.6,2154.8 ; 1897.5,2161.7 1905.6,2161.7 ; 1897.5,2162 1905.6,2162 ; 1897.5,2162.3 1905.6,2162.3 ; 1897.5,2162.6 1905.9,2162.6 ; 1897.5,2164.1 1905.9,2164.1 ; 1897.5,2164.4 1905.9,2164.4 ; 1897.5,2164.7 1905.6,2164.7 ; 1897.5,2165 1905.6,2165 ; 1897.8,2140.7 1907.1,2140.7 ; 1897.8,2150.9 1905.3,2150.9 ; 1897.8,2151.2 1905.6,2151.2 ; 1897.8,2155.1 1905.3,2155.1 ; 1897.8,2155.4 1905.3,2155.4 ; 1897.8,2161.1 1905.3,2161.1 ; 1897.8,2161.4 1905.3,2161.4 ; 1897.8,2165.3 1905.6,2165.3 ; 1897.8,2165.6 1905.3,2165.6 ; 1898.1,2150.6 1905,2150.6 ; 1898.1,2155.7 1905,2155.7 ; 1898.1,2160.8 1905,2160.8 ; 1898.1,2165.9 1905,2165.9 ; 1898.4,2129 1901.1,2129 ; 1898.4,2129.3 1900.8,2129.3 ; 1898.4,2140.1 1900.8,2140.1 ; 1898.4,2140.4 1907.1,2140.4 ; 1898.4,2150 1904.7,2150 ; 1898.4,2150.3 1905,2150.3 ; 1898.4,2156 1904.7,2156 ; 1898.4,2160.5 1904.7,2160.5 ; 1898.4,2166.2 1905,2166.2 ; 1898.4,2166.5 1904.7,2166.5 ; 1898.4,2278.7 2015.7,2278.7 ; 1898.7,2129.6 1900.8,2129.6 ; 1898.7,2129.9 1900.8,2129.9 ; 1898.7,2130.2 1900.8,2130.2 ; 1898.7,2130.5 1900.8,2130.5 ; 1898.7,2130.8 1900.8,2130.8 ; 1898.7,2131.1 1900.8,2131.1 ; 1898.7,2131.4 1900.8,2131.4 ; 1898.7,2131.7 1900.8,2131.7 ; 1898.7,2132 1900.8,2132 ; 1898.7,2132.3 1900.8,2132.3 ; 1898.7,2132.6 1900.8,2132.6 ; 1898.7,2132.9 1900.8,2132.9 ; 1898.7,2133.2 1900.8,2133.2 ; 1898.7,2133.5 1900.8,2133.5 ; 1898.7,2133.8 1900.8,2133.8 ; 1898.7,2134.1 1900.8,2134.1 ; 1898.7,2134.4 1900.8,2134.4 ; 1898.7,2134.7 1906.2,2134.7 ; 1898.7,2135 1906.2,2135 ; 1898.7,2135.3 1906.2,2135.3 ; 1898.7,2135.6 1900.8,2135.6 ; 1898.7,2135.9 1900.8,2135.9 ; 1898.7,2136.2 1900.8,2136.2 ; 1898.7,2136.5 1900.8,2136.5 ; 1898.7,2136.8 1900.8,2136.8 ; 1898.7,2137.1 1900.8,2137.1 ; 1898.7,2137.4 1900.8,2137.4 ; 1898.7,2137.7 1900.8,2137.7 ; 1898.7,2138 1900.8,2138 ; 1898.7,2138.3 1900.8,2138.3 ; 1898.7,2138.6 1900.8,2138.6 ; 1898.7,2138.9 1900.8,2138.9 ; 1898.7,2139.2 1900.8,2139.2 ; 1898.7,2139.5 1900.8,2139.5 ; 1898.7,2139.8 1900.8,2139.8 ; 1898.7,2156.3 1904.4,2156.3 ; 1898.7,2160.2 1904.4,2160.2 ; 1899,2149.7 1904.4,2149.7 ; 1899,2156.6 1904.1,2156.6 ; 1899,2159.9 1904.1,2159.9 ; 1899,2166.8 1904.4,2166.8 ; 1899.3,2149.4 1903.8,2149.4 ; 1899.3,2167.1 1903.8,2167.1 ; 1899.3,2173.4 1908,2173.4 ; 1899.3,2173.7 1908,2173.7 ; 1899.3,2174 1908,2174 ; 1899.3,2174.3 1908,2174.3 ; 1899.6,2156.9 1903.5,2156.9 ; 1899.6,2159.6 1903.8,2159.6 ; 1899.6,2172.2 1907.7,2172.2 ; 1899.6,2172.5 1907.7,2172.5 ; 1899.6,2172.8 1908,2172.8 ; 1899.6,2173.1 1908,2173.1 ; 1899.6,2174.6 1908,2174.6 ; 1899.6,2174.9 1907.7,2174.9 ; 1899.6,2175.2 1907.7,2175.2 ; 1899.6,2278.4 2013.9,2278.4 ; 1899.9,2149.1 1903.2,2149.1 ; 1899.9,2167.4 1903.2,2167.4 ; 1899.9,2171.6 1907.4,2171.6 ; 1899.9,2171.9 1907.7,2171.9 ; 1899.9,2175.5 1907.7,2175.5 ; 1899.9,2175.8 1907.4,2175.8 ; 1900.2,2157.2 1902.9,2157.2 ; 1900.2,2159.3 1902.9,2159.3 ; 1900.2,2171 1907.1,2171 ; 1900.2,2171.3 1907.4,2171.3 ; 1900.2,2176.1 1907.4,2176.1 ; 1900.2,2176.4 1907.1,2176.4 ; 1900.5,2170.7 1906.8,2170.7 ; 1900.5,2176.7 1906.8,2176.7 ; 1900.8,2170.4 1906.5,2170.4 ; 1900.8,2177 1906.5,2177 ; 1901.1,2278.1 2011.8,2278.1 ; 1901.1,2300.3 1975.5,2300.3 ; 1901.4,2170.1 1906.2,2170.1 ; 1901.4,2177.3 1906.2,2177.3 ; 1901.7,2169.8 1905.6,2169.8 ; 1901.7,2177.6 1905.6,2177.6 ; 1902.3,2277.8 2010,2277.8 ; 1902.6,2177.9 1904.7,2177.9 ; 1902.9,2169.5 1904.7,2169.5 ; 1903.5,2183 1911.9,2183 ; 1903.5,2183.3 1911.9,2183.3 ; 1903.5,2183.6 1911.9,2183.6 ; 1903.5,2183.9 1911.9,2183.9 ; 1903.5,2184.2 1911.9,2184.2 ; 1903.5,2184.5 1911.9,2184.5 ; 1903.5,2184.8 1911.9,2184.8 ; 1903.5,2185.1 1911.9,2185.1 ; 1903.8,2134.4 1906.2,2134.4 ; 1903.8,2182.1 1911.6,2182.1 ; 1903.8,2182.4 1911.9,2182.4 ; 1903.8,2182.7 1911.9,2182.7 ; 1903.8,2185.4 1911.9,2185.4 ; 1903.8,2185.7 1911.9,2185.7 ; 1903.8,2186 1911.6,2186 ; 1903.8,2277.5 2007.9,2277.5 ; 1904.1,2181.8 1911.6,2181.8 ; 1904.1,2186.3 1911.6,2186.3 ; 1904.4,2181.2 1911,2181.2 ; 1904.4,2181.5 1911.3,2181.5 ; 1904.4,2186.6 1911.3,2186.6 ; 1904.7,2134.1 1906.2,2134.1 ; 1904.7,2135.6 1906.2,2135.6 ; 1904.7,2180.9 1910.7,2180.9 ; 1904.7,2186.9 1911,2186.9 ; 1904.7,2300.6 1977,2300.6 ; 1905,2133.8 1906.2,2133.8 ; 1905,2135.9 1906.2,2135.9 ; 1905,2180.6 1910.4,2180.6 ; 1905,2187.2 1910.7,2187.2 ; 1905.3,2129 1907.7,2129 ; 1905.3,2132.6 1906.2,2132.6 ; 1905.3,2132.9 1906.2,2132.9 ; 1905.3,2133.2 1906.2,2133.2 ; 1905.3,2133.5 1906.2,2133.5 ; 1905.3,2136.2 1906.2,2136.2 ; 1905.3,2136.5 1906.2,2136.5 ; 1905.3,2136.8 1906.2,2136.8 ; 1905.3,2137.1 1906.2,2137.1 ; 1905.3,2187.5 1910.4,2187.5 ; 1905.3,2277.2 2006.1,2277.2 ; 1905.6,2180.3 1910.1,2180.3 ; 1905.6,2187.8 1909.8,2187.8 ; 1905.9,2129.3 1907.7,2129.3 ; 1905.9,2140.1 1907.1,2140.1 ; 1906.2,2139.5 1907.4,2139.5 ; 1906.2,2139.8 1907.4,2139.8 ; 1906.2,2180 1909.2,2180 ; 1906.2,2188.1 1909.2,2188.1 ; 1906.5,2129.6 1907.7,2129.6 ; 1906.5,2138.3 1907.4,2138.3 ; 1906.5,2138.6 1907.4,2138.6 ; 1906.5,2138.9 1907.4,2138.9 ; 1906.5,2139.2 1907.4,2139.2 ; 1906.8,2129.9 1908,2129.9 ; 1906.8,2130.2 1908,2130.2 ; 1906.8,2276.9 2003.7,2276.9 ; 1907.1,2130.5 1908,2130.5 ; 1907.4,2130.8 1908.3,2130.8 ; 1907.4,2131.1 1908.3,2131.1 ; 1907.7,2131.4 1908.3,2131.4 ; 1907.7,2162 1916.1,2162 ; 1907.7,2162.3 1916.1,2162.3 ; 1907.7,2162.6 1916.1,2162.6 ; 1907.7,2162.9 1916.1,2162.9 ; 1907.7,2163.2 1916.1,2163.2 ; 1907.7,2163.5 1916.1,2163.5 ; 1907.7,2163.8 1916.1,2163.8 ; 1907.7,2164.1 1916.1,2164.1 ; 1907.7,2164.4 1916.1,2164.4 ; 1907.7,2164.7 1916.1,2164.7 ; 1907.7,2193.2 1916.1,2193.2 ; 1907.7,2193.5 1916.1,2193.5 ; 1907.7,2193.8 1916.1,2193.8 ; 1907.7,2194.1 1916.1,2194.1 ; 1907.7,2194.4 1916.1,2194.4 ; 1907.7,2194.7 1916.1,2194.7 ; 1907.7,2195 1916.1,2195 ; 1907.7,2195.3 1916.1,2195.3 ; 1907.7,2195.6 1916.1,2195.6 ; 1908,2161.4 1915.8,2161.4 ; 1908,2161.7 1915.8,2161.7 ; 1908,2165 1915.8,2165 ; 1908,2165.3 1915.8,2165.3 ; 1908,2192.3 1915.8,2192.3 ; 1908,2192.6 1915.8,2192.6 ; 1908,2192.9 1916.1,2192.9 ; 1908,2195.9 1916.1,2195.9 ; 1908,2196.2 1915.8,2196.2 ; 1908,2196.5 1915.8,2196.5 ; 1908,2300.9 1978.2,2300.9 ; 1908.3,2160.8 1915.5,2160.8 ; 1908.3,2161.1 1915.5,2161.1 ; 1908.3,2165.6 1915.5,2165.6 ; 1908.3,2165.9 1915.5,2165.9 ; 1908.3,2192 1915.5,2192 ; 1908.3,2196.8 1915.5,2196.8 ; 1908.3,2276.6 2001.6,2276.6 ; 1908.6,2160.5 1915.2,2160.5 ; 1908.6,2166.2 1915.2,2166.2 ; 1908.6,2191.7 1915.2,2191.7 ; 1908.6,2197.1 1915.2,2197.1 ; 1908.9,2160.2 1914.9,2160.2 ; 1908.9,2166.5 1914.9,2166.5 ; 1908.9,2191.4 1915.2,2191.4 ; 1908.9,2197.4 1914.9,2197.4 ; 1909.2,2159.9 1914.6,2159.9 ; 1909.2,2166.8 1914.6,2166.8 ; 1909.2,2191.1 1914.9,2191.1 ; 1909.2,2197.7 1914.6,2197.7 ; 1909.5,2190.8 1914.3,2190.8 ; 1909.5,2198 1914.3,2198 ; 1909.8,2159.6 1914,2159.6 ; 1909.8,2167.1 1914.3,2167.1 ; 1910.1,2167.4 1913.7,2167.4 ; 1910.1,2190.5 1914,2190.5 ; 1910.1,2198.3 1913.7,2198.3 ; 1910.1,2276.3 1999.5,2276.3 ; 1910.4,2159.3 1913.4,2159.3 ; 1910.7,2190.2 1913.1,2190.2 ; 1910.7,2301.2 1979.7,2301.2 ; 1911,2198.6 1912.8,2198.6 ; 1911.6,2276 1997.1,2276 ; 1913.1,2301.5 1980.9,2301.5 ; 1913.4,2275.7 1994.7,2275.7 ; 1915.2,2301.8 1982.1,2301.8 ; 1915.5,2275.4 1992,2275.4 ; 1917,2141 1923,2141 ; 1917,2141.3 1923,2141.3 ; 1917.3,2302.1 1983.3,2302.1 ; 1917.9,2140.7 1922.1,2140.7 ; 1917.9,2162.3 1926.3,2162.3 ; 1917.9,2162.6 1926.3,2162.6 ; 1917.9,2162.9 1926.3,2162.9 ; 1917.9,2163.2 1926.3,2163.2 ; 1917.9,2163.5 1926.3,2163.5 ; 1917.9,2163.8 1926.3,2163.8 ; 1917.9,2164.1 1926.3,2164.1 ; 1917.9,2164.4 1926.3,2164.4 ; 1917.9,2193.2 1926.3,2193.2 ; 1917.9,2193.5 1926.3,2193.5 ; 1917.9,2193.8 1926.3,2193.8 ; 1917.9,2194.1 1926.3,2194.1 ; 1917.9,2194.4 1926.3,2194.4 ; 1917.9,2194.7 1926.3,2194.7 ; 1917.9,2195 1926.3,2195 ; 1917.9,2195.3 1926.3,2195.3 ; 1917.9,2195.6 1926.3,2195.6 ; 1917.9,2275.1 1989.3,2275.1 ; 1918.2,2161.4 1926,2161.4 ; 1918.2,2161.7 1926,2161.7 ; 1918.2,2162 1926.3,2162 ; 1918.2,2164.7 1926.3,2164.7 ; 1918.2,2165 1926.3,2165 ; 1918.2,2165.3 1926,2165.3 ; 1918.2,2192.6 1926,2192.6 ; 1918.2,2192.9 1926.3,2192.9 ; 1918.2,2195.9 1926.3,2195.9 ; 1918.2,2196.2 1926,2196.2 ; 1918.5,2129 1921.8,2129 ; 1918.5,2140.1 1921.2,2140.1 ; 1918.5,2140.4 1921.5,2140.4 ; 1918.5,2161.1 1925.7,2161.1 ; 1918.5,2165.6 1926,2165.6 ; 1918.5,2165.9 1925.7,2165.9 ; 1918.5,2192 1925.7,2192 ; 1918.5,2192.3 1926,2192.3 ; 1918.5,2196.5 1926,2196.5 ; 1918.5,2196.8 1925.7,2196.8 ; 1918.8,2129.3 1921.2,2129.3 ; 1918.8,2129.6 1920.9,2129.6 ; 1918.8,2129.9 1920.9,2129.9 ; 1918.8,2130.2 1920.9,2130.2 ; 1918.8,2130.5 1920.9,2130.5 ; 1918.8,2130.8 1920.9,2130.8 ; 1918.8,2131.1 1920.9,2131.1 ; 1918.8,2131.4 1920.9,2131.4 ; 1918.8,2131.7 1920.9,2131.7 ; 1918.8,2132 1920.9,2132 ; 1918.8,2132.3 1920.9,2132.3 ; 1918.8,2132.6 1920.9,2132.6 ; 1918.8,2132.9 1920.9,2132.9 ; 1918.8,2133.2 1920.9,2133.2 ; 1918.8,2133.5 1920.9,2133.5 ; 1918.8,2133.8 1920.9,2133.8 ; 1918.8,2134.1 1920.9,2134.1 ; 1918.8,2134.4 1920.9,2134.4 ; 1918.8,2134.7 1920.9,2134.7 ; 1918.8,2135 1920.9,2135 ; 1918.8,2135.3 1920.9,2135.3 ; 1918.8,2135.6 1920.9,2135.6 ; 1918.8,2135.9 1920.9,2135.9 ; 1918.8,2136.2 1920.9,2136.2 ; 1918.8,2136.5 1920.9,2136.5 ; 1918.8,2136.8 1920.9,2136.8 ; 1918.8,2137.1 1920.9,2137.1 ; 1918.8,2137.4 1920.9,2137.4 ; 1918.8,2137.7 1920.9,2137.7 ; 1918.8,2138 1920.9,2138 ; 1918.8,2138.3 1920.9,2138.3 ; 1918.8,2138.6 1920.9,2138.6 ; 1918.8,2138.9 1920.9,2138.9 ; 1918.8,2139.2 1920.9,2139.2 ; 1918.8,2139.5 1920.9,2139.5 ; 1918.8,2139.8 1920.9,2139.8 ; 1918.8,2160.5 1925.4,2160.5 ; 1918.8,2160.8 1925.7,2160.8 ; 1918.8,2166.2 1925.4,2166.2 ; 1918.8,2191.7 1925.7,2191.7 ; 1918.8,2197.1 1925.4,2197.1 ; 1919.1,2160.2 1925.1,2160.2 ; 1919.1,2166.5 1925.1,2166.5 ; 1919.1,2191.4 1925.4,2191.4 ; 1919.1,2197.4 1925.4,2197.4 ; 1919.4,2166.8 1924.8,2166.8 ; 1919.4,2191.1 1925.1,2191.1 ; 1919.4,2197.7 1925.1,2197.7 ; 1919.4,2302.4 1984.5,2302.4 ; 1919.7,2159.9 1924.8,2159.9 ; 1919.7,2190.8 1924.5,2190.8 ; 1919.7,2198 1924.5,2198 ; 1920,2159.6 1924.2,2159.6 ; 1920,2167.1 1924.5,2167.1 ; 1920.3,2190.5 1924.2,2190.5 ; 1920.3,2198.3 1923.9,2198.3 ; 1920.6,2167.4 1923.9,2167.4 ; 1920.9,2159.3 1923.6,2159.3 ; 1920.9,2274.8 1986.3,2274.8 ; 1921.2,2190.2 1923.3,2190.2 ; 1921.2,2198.6 1923,2198.6 ; 1921.2,2302.7 1985.7,2302.7 ; 1923,2303 1986.9,2303 ; 1923.9,2274.5 1983,2274.5 ; 1924.8,2129 1927.8,2129 ; 1924.8,2303.3 1988.1,2303.3 ; 1926,2129.3 1927.8,2129.3 ; 1926.6,2129.6 1927.8,2129.6 ; 1926.6,2303.6 1989,2303.6 ; 1926.9,2129.9 1928.1,2129.9 ; 1927.2,2130.2 1928.1,2130.2 ; 1927.2,2130.5 1928.1,2130.5 ; 1927.2,2274.2 1979.4,2274.2 ; 1927.5,2130.8 1928.4,2130.8 ; 1927.5,2131.1 1928.4,2131.1 ; 1927.8,2131.4 1928.4,2131.4 ; 1927.8,2131.7 1928.4,2131.7 ; 1928.1,2159.3 1955.1,2159.3 ; 1928.1,2159.6 1955.1,2159.6 ; 1928.1,2159.9 1954.8,2159.9 ; 1928.1,2160.2 1954.8,2160.2 ; 1928.1,2160.5 1954.5,2160.5 ; 1928.1,2160.8 1954.5,2160.8 ; 1928.1,2161.1 1954.2,2161.1 ; 1928.1,2161.4 1954.2,2161.4 ; 1928.1,2161.7 1953.9,2161.7 ; 1928.1,2162 1953.9,2162 ; 1928.1,2162.3 1953.6,2162.3 ; 1928.1,2162.6 1953.6,2162.6 ; 1928.1,2162.9 1953.3,2162.9 ; 1928.1,2163.2 1953.3,2163.2 ; 1928.1,2163.5 1953,2163.5 ; 1928.1,2163.8 1953,2163.8 ; 1928.1,2164.1 1952.7,2164.1 ; 1928.1,2164.4 1952.7,2164.4 ; 1928.1,2164.7 1952.4,2164.7 ; 1928.1,2165 1952.4,2165 ; 1928.1,2165.3 1952.1,2165.3 ; 1928.1,2165.6 1952.1,2165.6 ; 1928.1,2165.9 1951.8,2165.9 ; 1928.1,2166.2 1951.8,2166.2 ; 1928.1,2166.5 1951.5,2166.5 ; 1928.1,2166.8 1951.5,2166.8 ; 1928.1,2167.1 1951.2,2167.1 ; 1928.1,2167.4 1951.2,2167.4 ; 1928.1,2190.2 1939.8,2190.2 ; 1928.1,2190.5 1939.8,2190.5 ; 1928.1,2190.8 1939.5,2190.8 ; 1928.1,2191.1 1939.5,2191.1 ; 1928.1,2191.4 1939.2,2191.4 ; 1928.1,2191.7 1939.2,2191.7 ; 1928.1,2192 1938.9,2192 ; 1928.1,2192.3 1938.9,2192.3 ; 1928.1,2192.6 1938.6,2192.6 ; 1928.1,2192.9 1938.6,2192.9 ; 1928.1,2193.2 1938.3,2193.2 ; 1928.1,2193.5 1938.3,2193.5 ; 1928.1,2193.8 1938,2193.8 ; 1928.1,2194.1 1938,2194.1 ; 1928.1,2194.4 1937.7,2194.4 ; 1928.1,2194.7 1937.7,2194.7 ; 1928.1,2195 1937.4,2195 ; 1928.1,2195.3 1937.4,2195.3 ; 1928.1,2195.6 1937.1,2195.6 ; 1928.1,2195.9 1937.1,2195.9 ; 1928.1,2196.2 1936.8,2196.2 ; 1928.1,2196.5 1936.8,2196.5 ; 1928.1,2196.8 1936.8,2196.8 ; 1928.1,2197.1 1936.8,2197.1 ; 1928.1,2197.4 1936.8,2197.4 ; 1928.1,2197.7 1936.8,2197.7 ; 1928.1,2198 1936.8,2198 ; 1928.1,2198.3 1936.8,2198.3 ; 1928.1,2198.6 1936.8,2198.6 ; 1928.1,2303.9 1990.2,2303.9 ; 1929.3,2189.6 1940.1,2189.6 ; 1929.3,2189.9 1940.1,2189.9 ; 1929.6,2189 1940.4,2189 ; 1929.6,2189.3 1940.4,2189.3 ; 1929.9,2188.4 1940.7,2188.4 ; 1929.9,2188.7 1940.7,2188.7 ; 1929.9,2304.2 1991.4,2304.2 ; 1930.2,2187.8 1941,2187.8 ; 1930.2,2188.1 1941,2188.1 ; 1930.5,2187.2 1941.3,2187.2 ; 1930.5,2187.5 1941.3,2187.5 ; 1930.8,2186.6 1941.6,2186.6 ; 1930.8,2186.9 1941.6,2186.9 ; 1931.1,2186 1941.9,2186 ; 1931.1,2186.3 1941.9,2186.3 ; 1931.4,2185.4 1942.2,2185.4 ; 1931.4,2185.7 1942.2,2185.7 ; 1931.4,2273.9 1975.5,2273.9 ; 1931.4,2304.5 1992.3,2304.5 ; 1931.7,2184.8 1942.5,2184.8 ; 1931.7,2185.1 1942.5,2185.1 ; 1932,2184.2 1942.8,2184.2 ; 1932,2184.5 1942.8,2184.5 ; 1932.3,2183.6 1943.1,2183.6 ; 1932.3,2183.9 1943.1,2183.9 ; 1932.6,2183 1943.4,2183 ; 1932.6,2183.3 1943.4,2183.3 ; 1932.9,2182.4 1943.7,2182.4 ; 1932.9,2182.7 1943.7,2182.7 ; 1933.2,2181.8 1944,2181.8 ; 1933.2,2182.1 1944,2182.1 ; 1933.2,2304.8 1993.5,2304.8 ; 1933.5,2181.2 1944.3,2181.2 ; 1933.5,2181.5 1944.3,2181.5 ; 1933.8,2180.6 1944.6,2180.6 ; 1933.8,2180.9 1944.6,2180.9 ; 1934.1,2180 1944.9,2180 ; 1934.1,2180.3 1944.9,2180.3 ; 1934.4,2179.4 1945.2,2179.4 ; 1934.4,2179.7 1945.2,2179.7 ; 1934.7,2178.8 1945.5,2178.8 ; 1934.7,2179.1 1945.5,2179.1 ; 1934.7,2305.1 1994.4,2305.1 ; 1935,2178.2 1945.8,2178.2 ; 1935,2178.5 1945.8,2178.5 ; 1935.3,2177.6 1946.1,2177.6 ; 1935.3,2177.9 1946.1,2177.9 ; 1935.6,2177 1946.4,2177 ; 1935.6,2177.3 1946.4,2177.3 ; 1935.9,2176.4 1946.7,2176.4 ; 1935.9,2176.7 1946.7,2176.7 ; 1936.2,2175.8 1947,2175.8 ; 1936.2,2176.1 1947,2176.1 ; 1936.2,2273.6 1970.4,2273.6 ; 1936.5,2175.2 1947.3,2175.2 ; 1936.5,2175.5 1947.3,2175.5 ; 1936.5,2305.4 1995.3,2305.4 ; 1936.8,2174.6 1947.6,2174.6 ; 1936.8,2174.9 1947.6,2174.9 ; 1937.1,2141 1947.6,2141 ; 1937.1,2141.3 1947.6,2141.3 ; 1937.1,2174 1947.9,2174 ; 1937.1,2174.3 1947.9,2174.3 ; 1937.4,2173.4 1948.2,2173.4 ; 1937.4,2173.7 1948.2,2173.7 ; 1937.7,2172.8 1948.5,2172.8 ; 1937.7,2173.1 1948.5,2173.1 ; 1938,2140.7 1947.6,2140.7 ; 1938,2172.2 1948.8,2172.2 ; 1938,2172.5 1948.8,2172.5 ; 1938,2305.7 1996.5,2305.7 ; 1938.3,2171.6 1949.1,2171.6 ; 1938.3,2171.9 1949.1,2171.9 ; 1938.6,2129 1941.3,2129 ; 1938.6,2140.4 1947.6,2140.4 ; 1938.6,2171 1949.4,2171 ; 1938.6,2171.3 1949.4,2171.3 ; 1938.9,2129.3 1941.3,2129.3 ; 1938.9,2129.6 1941,2129.6 ; 1938.9,2129.9 1941,2129.9 ; 1938.9,2130.2 1941,2130.2 ; 1938.9,2130.5 1941,2130.5 ; 1938.9,2130.8 1941,2130.8 ; 1938.9,2131.1 1941,2131.1 ; 1938.9,2131.4 1941,2131.4 ; 1938.9,2131.7 1941,2131.7 ; 1938.9,2132 1941,2132 ; 1938.9,2132.3 1941,2132.3 ; 1938.9,2132.6 1941,2132.6 ; 1938.9,2132.9 1941,2132.9 ; 1938.9,2133.2 1941,2133.2 ; 1938.9,2133.5 1941,2133.5 ; 1938.9,2133.8 1941,2133.8 ; 1938.9,2134.1 1941,2134.1 ; 1938.9,2134.4 1941,2134.4 ; 1938.9,2134.7 1946.4,2134.7 ; 1938.9,2135 1946.4,2135 ; 1938.9,2135.3 1946.4,2135.3 ; 1938.9,2135.6 1941,2135.6 ; 1938.9,2135.9 1941,2135.9 ; 1938.9,2136.2 1941,2136.2 ; 1938.9,2136.5 1941,2136.5 ; 1938.9,2136.8 1941,2136.8 ; 1938.9,2137.1 1941,2137.1 ; 1938.9,2137.4 1941,2137.4 ; 1938.9,2137.7 1941,2137.7 ; 1938.9,2138 1941,2138 ; 1938.9,2138.3 1941,2138.3 ; 1938.9,2138.6 1941,2138.6 ; 1938.9,2138.9 1941,2138.9 ; 1938.9,2139.2 1941,2139.2 ; 1938.9,2139.5 1941,2139.5 ; 1938.9,2139.8 1941,2139.8 ; 1938.9,2140.1 1941,2140.1 ; 1938.9,2170.4 1949.7,2170.4 ; 1938.9,2170.7 1949.7,2170.7 ; 1939.2,2169.8 1950,2169.8 ; 1939.2,2170.1 1950,2170.1 ; 1939.5,2169.2 1950.3,2169.2 ; 1939.5,2169.5 1950.3,2169.5 ; 1939.8,2168.6 1950.6,2168.6 ; 1939.8,2168.9 1950.6,2168.9 ; 1939.8,2306 1997.4,2306 ; 1940.1,2168 1950.9,2168 ; 1940.1,2168.3 1950.6,2168.3 ; 1940.4,2167.7 1950.9,2167.7 ; 1941.3,2306.3 1998.3,2306.3 ; 1942.8,2281.4 2030.7,2281.4 ; 1942.8,2306.6 1999.2,2306.6 ; 1943.4,2273.3 1963.2,2273.3 ; 1944,2134.4 1946.4,2134.4 ; 1944.3,2306.9 2000.1,2306.9 ; 1944.6,2159 1955.4,2159 ; 1944.9,2135.6 1946.4,2135.6 ; 1944.9,2158.4 1955.7,2158.4 ; 1944.9,2158.7 1955.4,2158.7 ; 1945.2,2134.1 1946.4,2134.1 ; 1945.2,2135.9 1946.4,2135.9 ; 1945.2,2157.8 1956,2157.8 ; 1945.2,2158.1 1955.7,2158.1 ; 1945.5,2129 1947.9,2129 ; 1945.5,2133.2 1946.4,2133.2 ; 1945.5,2133.5 1946.4,2133.5 ; 1945.5,2133.8 1946.4,2133.8 ; 1945.5,2136.2 1946.4,2136.2 ; 1945.5,2136.5 1946.4,2136.5 ; 1945.5,2157.2 1956.3,2157.2 ; 1945.5,2157.5 1956,2157.5 ; 1945.8,2132.6 1946.4,2132.6 ; 1945.8,2132.9 1946.4,2132.9 ; 1945.8,2136.8 1946.4,2136.8 ; 1945.8,2137.1 1946.4,2137.1 ; 1945.8,2156.6 1956.6,2156.6 ; 1945.8,2156.9 1956.3,2156.9 ; 1945.8,2307.2 2001,2307.2 ; 1946.1,2140.1 1947.6,2140.1 ; 1946.1,2156 1956.9,2156 ; 1946.1,2156.3 1956.6,2156.3 ; 1946.4,2129.3 1947.9,2129.3 ; 1946.4,2139.8 1947.6,2139.8 ; 1946.4,2155.4 1957.2,2155.4 ; 1946.4,2155.7 1956.9,2155.7 ; 1946.7,2129.6 1948.2,2129.6 ; 1946.7,2138.9 1947.6,2138.9 ; 1946.7,2139.2 1947.6,2139.2 ; 1946.7,2139.5 1947.6,2139.5 ; 1946.7,2154.8 1957.2,2154.8 ; 1946.7,2155.1 1957.2,2155.1 ; 1947,2129.9 1948.2,2129.9 ; 1947,2138.3 1947.6,2138.3 ; 1947,2138.6 1947.6,2138.6 ; 1947,2154.2 1957.2,2154.2 ; 1947,2154.5 1957.2,2154.5 ; 1947.3,2130.2 1948.2,2130.2 ; 1947.3,2130.5 1948.5,2130.5 ; 1947.3,2153.6 1957.2,2153.6 ; 1947.3,2153.9 1957.2,2153.9 ; 1947.3,2307.5 2001.9,2307.5 ; 1947.6,2130.8 1948.5,2130.8 ; 1947.6,2131.1 1948.5,2131.1 ; 1947.6,2153 1957.2,2153 ; 1947.6,2153.3 1957.2,2153.3 ; 1947.9,2131.4 1948.5,2131.4 ; 1947.9,2152.4 1957.2,2152.4 ; 1947.9,2152.7 1957.2,2152.7 ; 1948.2,2151.8 1957.2,2151.8 ; 1948.2,2152.1 1957.2,2152.1 ; 1948.5,2151.2 1957.2,2151.2 ; 1948.5,2151.5 1957.2,2151.5 ; 1948.8,2148.8 1957.2,2148.8 ; 1948.8,2149.1 1957.2,2149.1 ; 1948.8,2149.4 1957.2,2149.4 ; 1948.8,2149.7 1957.2,2149.7 ; 1948.8,2150 1957.2,2150 ; 1948.8,2150.3 1957.2,2150.3 ; 1948.8,2150.6 1957.2,2150.6 ; 1948.8,2150.9 1957.2,2150.9 ; 1948.8,2307.8 2002.8,2307.8 ; 1949.4,2393 1949.7,2393 ; 1949.4,2393.3 1950,2393.3 ; 1949.4,2393.6 1950.3,2393.6 ; 1949.4,2393.9 1950.6,2393.9 ; 1949.7,2394.2 1950.6,2394.2 ; 1949.7,2394.5 1950.9,2394.5 ; 1949.7,2394.8 1951.2,2394.8 ; 1949.7,2395.1 1951.2,2395.1 ; 1950,2308.1 2003.7,2308.1 ; 1950,2395.4 1951.5,2395.4 ; 1950,2395.7 1951.8,2395.7 ; 1950,2396 1951.8,2396 ; 1950.3,2396.3 1952.1,2396.3 ; 1950.3,2396.6 1952.4,2396.6 ; 1950.3,2396.9 1952.4,2396.9 ; 1950.6,2281.7 2032.5,2281.7 ; 1950.6,2397.2 1952.7,2397.2 ; 1950.6,2397.5 1953,2397.5 ; 1950.6,2397.8 1953,2397.8 ; 1950.9,2398.1 1953.3,2398.1 ; 1950.9,2398.4 1953.3,2398.4 ; 1950.9,2398.7 1953.6,2398.7 ; 1951.2,2399 1953.9,2399 ; 1951.2,2399.3 1953.9,2399.3 ; 1951.5,2308.4 2004.3,2308.4 ; 1951.5,2399.6 1954.2,2399.6 ; 1951.5,2399.9 1954.2,2399.9 ; 1951.8,2400.2 1954.5,2400.2 ; 1951.8,2400.5 1954.8,2400.5 ; 1951.8,2400.8 1954.8,2400.8 ; 1952.1,2401.1 1955.1,2401.1 ; 1952.1,2401.4 1955.1,2401.4 ; 1952.4,2401.7 1955.4,2401.7 ; 1952.4,2402 1955.7,2402 ; 1952.7,2308.7 2005.2,2308.7 ; 1952.7,2402.3 1955.7,2402.3 ; 1952.7,2402.6 1956,2402.6 ; 1953,2402.9 1956.3,2402.9 ; 1953,2403.2 1956.3,2403.2 ; 1953.3,2403.5 1956.6,2403.5 ; 1953.3,2403.8 1956.6,2403.8 ; 1953.6,2404.1 1956.9,2404.1 ; 1953.6,2404.4 1957.2,2404.4 ; 1953.9,2404.7 1957.2,2404.7 ; 1954.2,2309 2006.1,2309 ; 1954.2,2405 1957.5,2405 ; 1954.2,2405.3 1957.8,2405.3 ; 1954.5,2405.6 1957.8,2405.6 ; 1954.5,2405.9 1958.1,2405.9 ; 1954.8,2406.2 1958.4,2406.2 ; 1954.8,2406.5 1958.4,2406.5 ; 1955.1,2406.8 1958.7,2406.8 ; 1955.4,2309.3 2006.7,2309.3 ; 1955.4,2407.1 1959,2407.1 ; 1955.4,2407.4 1959,2407.4 ; 1955.7,2407.7 1959.3,2407.7 ; 1955.7,2408 1959.6,2408 ; 1956,2282 2034,2282 ; 1956,2408.3 1959.6,2408.3 ; 1956.3,2408.6 1959.9,2408.6 ; 1956.3,2408.9 1960.2,2408.9 ; 1956.6,2309.6 2007.6,2309.6 ; 1956.6,2409.2 1960.2,2409.2 ; 1956.6,2409.5 1960.5,2409.5 ; 1956.9,2409.8 1960.8,2409.8 ; 1957.2,2410.1 1961.1,2410.1 ; 1957.2,2410.4 1961.1,2410.4 ; 1957.5,2132.9 1960.2,2132.9 ; 1957.5,2133.2 1960.2,2133.2 ; 1957.5,2133.5 1960.2,2133.5 ; 1957.5,2133.8 1959.9,2133.8 ; 1957.5,2134.1 1959.9,2134.1 ; 1957.5,2134.4 1959.9,2134.4 ; 1957.5,2134.7 1959.9,2134.7 ; 1957.5,2135 1959.9,2135 ; 1957.5,2135.3 1960.2,2135.3 ; 1957.5,2135.6 1960.2,2135.6 ; 1957.5,2135.9 1960.2,2135.9 ; 1957.5,2410.7 1961.4,2410.7 ; 1957.8,2131.7 1960.5,2131.7 ; 1957.8,2132 1960.2,2132 ; 1957.8,2132.3 1960.2,2132.3 ; 1957.8,2132.6 1960.2,2132.6 ; 1957.8,2136.2 1960.2,2136.2 ; 1957.8,2136.5 1960.2,2136.5 ; 1957.8,2136.8 1960.2,2136.8 ; 1957.8,2137.1 1960.5,2137.1 ; 1957.8,2411 1961.7,2411 ; 1957.8,2411.3 1962,2411.3 ; 1958.1,2131.1 1960.8,2131.1 ; 1958.1,2131.4 1960.5,2131.4 ; 1958.1,2137.4 1960.5,2137.4 ; 1958.1,2137.7 1960.5,2137.7 ; 1958.1,2309.9 2008.2,2309.9 ; 1958.1,2411.6 1962,2411.6 ; 1958.4,2130.5 1961.1,2130.5 ; 1958.4,2130.8 1960.8,2130.8 ; 1958.4,2138 1960.8,2138 ; 1958.4,2138.3 1960.8,2138.3 ; 1958.4,2411.9 1962.3,2411.9 ; 1958.4,2412.2 1962.6,2412.2 ; 1958.7,2130.2 1961.4,2130.2 ; 1958.7,2138.6 1961.1,2138.6 ; 1958.7,2138.9 1961.1,2138.9 ; 1958.7,2412.5 1962.9,2412.5 ; 1959,2129.6 1962,2129.6 ; 1959,2129.9 1961.7,2129.9 ; 1959,2139.2 1961.4,2139.2 ; 1959,2412.8 1962.9,2412.8 ; 1959,2413.1 1963.2,2413.1 ; 1959.3,2129.3 1962.3,2129.3 ; 1959.3,2139.5 1961.7,2139.5 ; 1959.3,2310.2 2009.1,2310.2 ; 1959.3,2413.4 1963.5,2413.4 ; 1959.6,2129 1962.9,2129 ; 1959.6,2139.8 1962,2139.8 ; 1959.6,2413.7 1963.8,2413.7 ; 1959.6,2414 1963.8,2414 ; 1959.9,2140.1 1962.3,2140.1 ; 1959.9,2414.3 1964.1,2414.3 ; 1960.2,2140.4 1962.9,2140.4 ; 1960.2,2414.6 1964.4,2414.6 ; 1960.2,2414.9 1964.7,2414.9 ; 1960.5,2282.3 2035.5,2282.3 ; 1960.5,2310.5 2009.7,2310.5 ; 1960.5,2415.2 1965,2415.2 ; 1960.8,2140.7 1964.1,2140.7 ; 1960.8,2415.5 1965,2415.5 ; 1961.1,2141 1967.4,2141 ; 1961.1,2151.8 1969.5,2151.8 ; 1961.1,2152.1 1969.5,2152.1 ; 1961.1,2152.4 1969.5,2152.4 ; 1961.1,2152.7 1969.5,2152.7 ; 1961.1,2153 1969.5,2153 ; 1961.1,2153.3 1969.5,2153.3 ; 1961.1,2153.6 1969.5,2153.6 ; 1961.1,2153.9 1969.5,2153.9 ; 1961.1,2154.2 1969.5,2154.2 ; 1961.1,2154.5 1969.5,2154.5 ; 1961.1,2162 1969.5,2162 ; 1961.1,2162.3 1969.5,2162.3 ; 1961.1,2162.6 1969.5,2162.6 ; 1961.1,2162.9 1969.5,2162.9 ; 1961.1,2163.2 1969.5,2163.2 ; 1961.1,2163.5 1969.5,2163.5 ; 1961.1,2163.8 1969.5,2163.8 ; 1961.1,2164.1 1969.5,2164.1 ; 1961.1,2164.4 1969.5,2164.4 ; 1961.1,2164.7 1969.5,2164.7 ; 1961.1,2172.5 1969.5,2172.5 ; 1961.1,2172.8 1969.5,2172.8 ; 1961.1,2173.1 1969.5,2173.1 ; 1961.1,2173.4 1969.5,2173.4 ; 1961.1,2173.7 1969.5,2173.7 ; 1961.1,2174 1969.5,2174 ; 1961.1,2174.3 1969.5,2174.3 ; 1961.1,2174.6 1969.5,2174.6 ; 1961.1,2174.9 1969.5,2174.9 ; 1961.1,2182.7 1969.5,2182.7 ; 1961.1,2183 1969.5,2183 ; 1961.1,2183.3 1969.5,2183.3 ; 1961.1,2183.6 1969.5,2183.6 ; 1961.1,2183.9 1969.5,2183.9 ; 1961.1,2184.2 1969.5,2184.2 ; 1961.1,2184.5 1969.5,2184.5 ; 1961.1,2184.8 1969.5,2184.8 ; 1961.1,2185.1 1969.5,2185.1 ; 1961.1,2185.4 1969.5,2185.4 ; 1961.1,2193.2 1969.5,2193.2 ; 1961.1,2193.5 1969.5,2193.5 ; 1961.1,2193.8 1969.5,2193.8 ; 1961.1,2194.1 1969.5,2194.1 ; 1961.1,2194.4 1969.5,2194.4 ; 1961.1,2194.7 1969.5,2194.7 ; 1961.1,2195 1969.5,2195 ; 1961.1,2195.3 1969.5,2195.3 ; 1961.1,2195.6 1969.5,2195.6 ; 1961.1,2415.8 1965.3,2415.8 ; 1961.1,2416.1 1965.6,2416.1 ; 1961.4,2151.2 1969.2,2151.2 ; 1961.4,2151.5 1969.2,2151.5 ; 1961.4,2154.8 1969.2,2154.8 ; 1961.4,2155.1 1969.2,2155.1 ; 1961.4,2161.4 1969.2,2161.4 ; 1961.4,2161.7 1969.2,2161.7 ; 1961.4,2165 1969.2,2165 ; 1961.4,2165.3 1969.2,2165.3 ; 1961.4,2171.6 1969.2,2171.6 ; 1961.4,2171.9 1969.2,2171.9 ; 1961.4,2172.2 1969.5,2172.2 ; 1961.4,2175.2 1969.5,2175.2 ; 1961.4,2175.5 1969.2,2175.5 ; 1961.4,2175.8 1969.2,2175.8 ; 1961.4,2182.1 1969.2,2182.1 ; 1961.4,2182.4 1969.2,2182.4 ; 1961.4,2185.7 1969.2,2185.7 ; 1961.4,2186 1969.2,2186 ; 1961.4,2192.3 1969.2,2192.3 ; 1961.4,2192.6 1969.2,2192.6 ; 1961.4,2192.9 1969.5,2192.9 ; 1961.4,2195.9 1969.2,2195.9 ; 1961.4,2196.2 1969.2,2196.2 ; 1961.4,2196.5 1969.2,2196.5 ; 1961.4,2416.4 1965.9,2416.4 ; 1961.7,2141.3 1966.8,2141.3 ; 1961.7,2150.6 1968.9,2150.6 ; 1961.7,2150.9 1968.9,2150.9 ; 1961.7,2155.4 1968.9,2155.4 ; 1961.7,2160.8 1968.9,2160.8 ; 1961.7,2161.1 1968.9,2161.1 ; 1961.7,2165.6 1968.9,2165.6 ; 1961.7,2165.9 1968.9,2165.9 ; 1961.7,2171.3 1968.9,2171.3 ; 1961.7,2176.1 1968.9,2176.1 ; 1961.7,2181.5 1968.9,2181.5 ; 1961.7,2181.8 1968.9,2181.8 ; 1961.7,2186.3 1968.9,2186.3 ; 1961.7,2186.6 1968.9,2186.6 ; 1961.7,2192 1968.9,2192 ; 1961.7,2196.8 1968.9,2196.8 ; 1961.7,2310.8 2010.6,2310.8 ; 1961.7,2416.7 1966.2,2416.7 ; 1961.7,2417 1966.5,2417 ; 1962,2150.3 1968.6,2150.3 ; 1962,2155.7 1968.9,2155.7 ; 1962,2156 1968.6,2156 ; 1962,2160.5 1968.6,2160.5 ; 1962,2166.2 1968.6,2166.2 ; 1962,2171 1968.6,2171 ; 1962,2176.4 1968.6,2176.4 ; 1962,2181.2 1968.6,2181.2 ; 1962,2186.9 1968.6,2186.9 ; 1962,2191.7 1968.6,2191.7 ; 1962,2197.1 1968.6,2197.1 ; 1962,2417.3 1966.5,2417.3 ; 1962.3,2150 1968.3,2150 ; 1962.3,2156.3 1968.3,2156.3 ; 1962.3,2160.2 1968.3,2160.2 ; 1962.3,2166.5 1968.3,2166.5 ; 1962.3,2170.7 1968.3,2170.7 ; 1962.3,2176.7 1968.3,2176.7 ; 1962.3,2180.9 1968.3,2180.9 ; 1962.3,2187.2 1968.3,2187.2 ; 1962.3,2191.4 1968.6,2191.4 ; 1962.3,2197.4 1968.3,2197.4 ; 1962.3,2417.6 1966.8,2417.6 ; 1962.6,2149.7 1968,2149.7 ; 1962.6,2166.8 1968,2166.8 ; 1962.6,2170.4 1968,2170.4 ; 1962.6,2177 1968,2177 ; 1962.6,2180.6 1968,2180.6 ; 1962.6,2187.5 1968,2187.5 ; 1962.6,2191.1 1968,2191.1 ; 1962.6,2197.7 1968,2197.7 ; 1962.6,2417.9 1967.1,2417.9 ; 1962.6,2418.2 1967.4,2418.2 ; 1962.9,2141.6 1965.6,2141.6 ; 1962.9,2149.4 1967.7,2149.4 ; 1962.9,2156.6 1967.7,2156.6 ; 1962.9,2159.9 1968,2159.9 ; 1962.9,2170.1 1967.7,2170.1 ; 1962.9,2177.3 1967.7,2177.3 ; 1962.9,2190.8 1967.7,2190.8 ; 1962.9,2198 1967.7,2198 ; 1962.9,2311.1 2011.2,2311.1 ; 1962.9,2418.5 1967.7,2418.5 ; 1963.2,2156.9 1967.4,2156.9 ; 1963.2,2159.6 1967.4,2159.6 ; 1963.2,2167.1 1967.4,2167.1 ; 1963.2,2180.3 1967.4,2180.3 ; 1963.2,2187.8 1967.4,2187.8 ; 1963.2,2418.8 1968,2418.8 ; 1963.5,2149.1 1967.1,2149.1